# EAGLE board demeter_v22 (EAGLE 6.2)
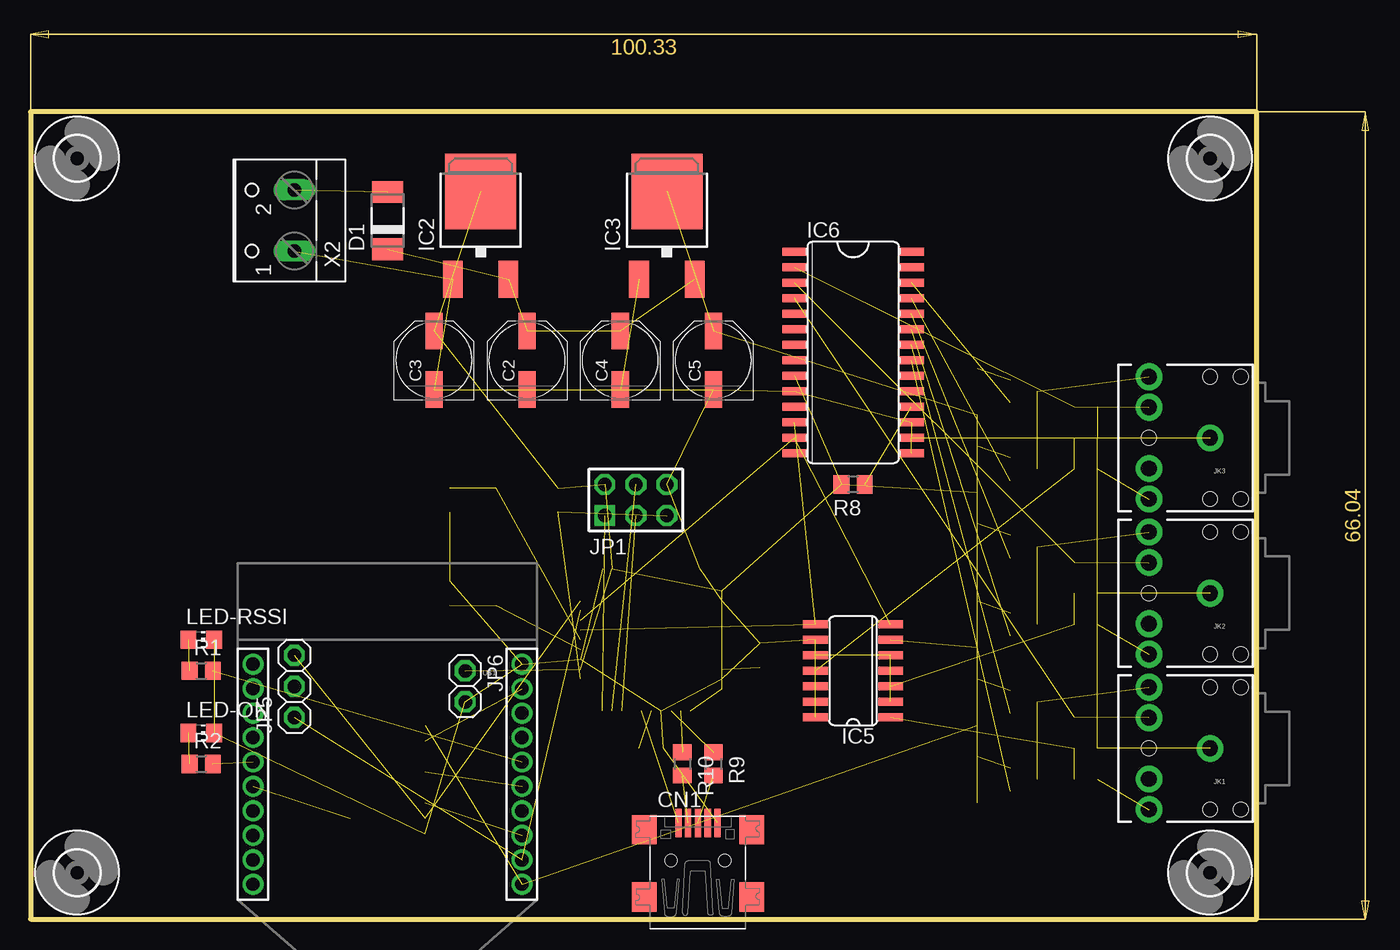
[diagram p0: board, top side]
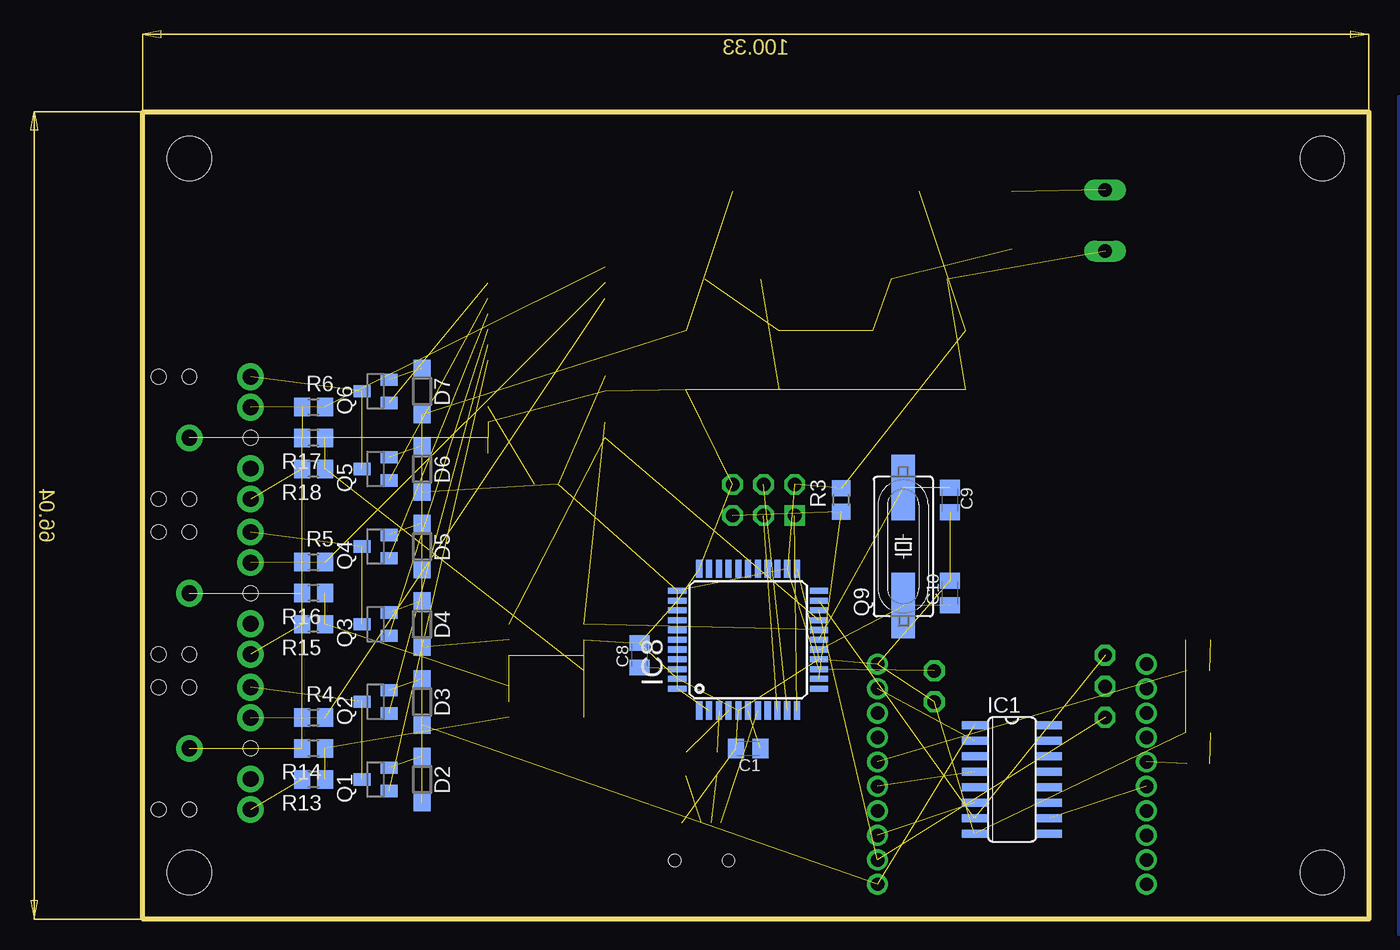
[diagram p1: board, bottom side, seen from below]

Size 100.33 x 66.04 mm. Coordinates in mm from the lower left corner, seen from the top.
Outline: 0,0 100.33,0 100.33,66.04 0,66.04 0,0
Copper layers (1*16): Top 0.035mm / dielectric 1.5mm / Bottom 0.035mm
Design rules: minimum track width 12mil, minimum drill 1.1mm, track to track 8mil, track to pad 8mil, pad to pad 8mil, via to via 8mil, smd to smd 8mil, copper to edge 10mil, drill to drill 8mil, minimum pad ring 12mil, minimum via ring 10mil, stop-mask expansion 4mil, vias tented up to drill 25mil, thermal gap 10mil

## Footprints (pad centres in the part's own frame; a part is rotated, then mirrored left to right if it is on the bottom)
C0805K = smd 1.3 x 1.6: 1 -1,0; 2 1,0
PANASONIC_D = smd 3 x 1.4: + 2.4,0; - -2.4,0
USB-MINIB = smd 0.5 x 2.308: D+ 0,4.064; D- -0.8,4.064; GND 1.6,4.064; ID 0.8,4.064; VBUS -1.6,4.064 | smd 2 x 2.4: GND1 -4.4,-2; GND2 -4.4,3.5; GND3 4.4,3.5; GND4 4.4,-2 | hole 1: -2.2,1; 2.2,1
DO-214AC = smd 1.778 x 2.54: A 2.342,0; C -2.342,0
SOD123 = smd 1.4 x 1.4: A 1.9,0; C -1.9,0
SO16 = smd 0.66 x 2.032: 1 -4.445,-3.073; 2 -3.175,-3.073; 3 -1.905,-3.073; 4 -0.635,-3.073; 5 0.635,-3.073; 6 1.905,-3.073; 7 3.175,-3.073; 8 4.445,-3.073; 9 4.445,3.073; 10 3.175,3.073; 11 1.905,3.073; 12 0.635,3.073; 13 -0.635,3.073; 14 -1.905,3.073; 15 -3.175,3.073; 16 -4.445,3.073
DPACK = smd 1.6 x 3: 1 -2.28,-4.8; 3 2.28,-4.8 | smd 5.8 x 6.2: 4 0,2.38
SO14 = smd 2.032 x 0.66: 1 -3.073,3.81; 2 -3.073,2.54; 3 -3.073,1.27; 4 -3.073,0; 5 -3.073,-1.27; 6 -3.073,-2.54; 7 -3.073,-3.81; 8 3.073,-3.81; 9 3.073,-2.54; 10 3.073,-1.27; 11 3.073,0; 12 3.073,1.27; 13 3.073,2.54; 14 3.073,3.81
SO28W = smd 0.66 x 2.032: 1 -7.62,-4.78; 2 -6.35,-4.78; 3 -5.08,-4.78; 4 -3.81,-4.78; 5 -2.54,-4.78; 6 -1.27,-4.78; 7 0,-4.78; 8 1.27,-4.78; 9 2.54,-4.78; 10 3.81,-4.78; 11 5.08,-4.78; 12 6.35,-4.78; 13 7.62,-4.78; 14 8.89,-4.78; 15 8.89,4.78; 16 7.62,4.78; 17 6.35,4.78; 18 5.08,4.78; 19 3.81,4.78; 20 2.54,4.78; 21 1.27,4.78; 22 0,4.78; 23 -1.27,4.78; 24 -2.54,4.78; 25 -3.81,4.78; 26 -5.08,4.78; 27 -6.35,4.78; 28 -7.62,4.78
TQFP44 = smd 1.5 x 0.5: 1 -5.8,4; 2 -5.8,3.2; 3 -5.8,2.4; 4 -5.8,1.6; 5 -5.8,0.8; 6 -5.8,0; 7 -5.8,-0.8; 8 -5.8,-1.6; 9 -5.8,-2.4; 10 -5.8,-3.2; 11 -5.8,-4; 23 5.8,-4; 24 5.8,-3.2; 25 5.8,-2.4; 26 5.8,-1.6; 27 5.8,-0.8; 28 5.8,0; 29 5.8,0.8; 30 5.8,1.6; 31 5.8,2.4; 32 5.8,3.2; 33 5.8,4 | smd 0.5 x 1.5: 12 -4,-5.8; 13 -3.2,-5.8; 14 -2.4,-5.8; 15 -1.6,-5.8; 16 -0.8,-5.8; 17 0,-5.8; 18 0.8,-5.8; 19 1.6,-5.8; 20 2.4,-5.8; 21 3.2,-5.8; 22 4,-5.8; 34 4,5.8; 35 3.2,5.8; 36 2.4,5.8; 37 1.6,5.8; 38 0.8,5.8; 39 0,5.8; 40 -0.8,5.8; 41 -1.6,5.8; 42 -2.4,5.8; 43 -3.2,5.8; 44 -4,5.8
AUDIO-JACK = drill 1.3 pad 2.184: RING 5,5; RSH 5,2.5; SLEEVE 0,0; TIP 5,-5; TSH 5,-2.5 | hole 1.2: 0,5; -2.5,5; -2.5,-5; 0,-5; 5,0
AVR-ISP-6 = drill 1.1 square: 1 -2.54,-1.27 | drill 1.1 octagon: 2 -2.54,1.27; 3 0,-1.27; 4 0,1.27; 5 2.54,-1.27; 6 2.54,1.27
1X03 = drill 1.1 octagon: 1 -2.54,0; 2 0,0; 3 2.54,0
1X02 = drill 1.1 octagon: 1 -1.27,0; 2 1.27,0
CHIP-LED0805 = smd 1.5 x 1.3: A 0,-1.05; C 0,1.05
SOT23 = smd 1 x 1.4: 1 -0.95,-1.1; 2 0.95,-1.1; 3 0,1.1
HC49UP = smd 5.334 x 1.93: 1 -4.826,0; 2 4.826,0
R0805 = smd 1.3 x 1.5: 1 -0.95,0; 2 0.95,0
XBEE-1 = drill 1.1: 1 -11,20; 2 -11,18; 3 -11,16; 4 -11,14; 5 -11,12; 6 -11,10; 7 -11,8; 8 -11,6; 9 -11,4; 10 -11,2; 11 11,2; 12 11,4; 13 11,6; 14 11,8; 15 11,10; 16 11,12; 17 11,14; 18 11,16; 19 11,18; 20 11,20
3,6 = hole 3.6: 0,0
W237-102 = drill 1.1 long: 1 -2.5,-1.27; 2 2.5,-1.27

## Placement (x,y rotation side)
C1  1uF  [C0805K]  50.8,13.97 180 bottom
C2  22uF  [PANASONIC_D]  40.64,45.72 90 top
C3  100uF  [PANASONIC_D]  33.02,45.72 90 top
C4  22uF  [PANASONIC_D]  48.26,45.72 90 top
C5  100uF  [PANASONIC_D]  55.88,45.72 90 top
C8  100nF  [C0805K]  59.69,21.59 90 bottom
C9  22pF  [C0805K]  34.29,34.29 270 bottom
C10  22pF  [C0805K]  34.29,26.67 90 bottom
CN1  [USB-MINIB]  54.61,3.81 0 top
D1  S1M  [DO-214AC]  29.21,57.15 90 top
D2  [SOD123]  77.47,11.43 270 bottom
D3  [SOD123]  77.47,17.78 270 bottom
D4  [SOD123]  77.47,24.13 270 bottom
D5  [SOD123]  77.47,30.48 270 bottom
D6  [SOD123]  77.47,36.83 270 bottom
D7  [SOD123]  77.47,43.18 270 bottom
IC1  4050  [SO16]  29.21,11.43 270 bottom
IC2  LM1117-5.0  [DPACK]  36.83,57.15 0 top
IC3  LM1117-3.3  [DPACK]  52.07,57.15 0 top
IC5  MCP3424  [SO14]  67.31,20.32 180 top
IC6  MCP23017SO  [SO28W]  67.31,46.99 270 top
IC8  ATMEGA32U4-AU  [TQFP44]  50.8,22.86 90 bottom
JK1  [AUDIO-JACK]  96.52,13.97 180 top
JK2  [AUDIO-JACK]  96.52,26.67 180 top
JK3  [AUDIO-JACK]  96.52,39.37 180 top
JP1  AVR-ISP-6  [AVR-ISP-6]  49.53,34.29 0 top
JP5  [1X03]  21.59,19.05 90 top
JP6  [1X02]  35.56,19.05 270 top
LED-ON  [CHIP-LED0805]  13.97,15.24 270 top
LED-RSSI  [CHIP-LED0805]  13.97,22.86 270 top
Q1  IRLML6402  [SOT23]  81.28,11.43 90 bottom
Q2  [SOT23]  81.28,17.78 90 bottom
Q3  IRLML6402  [SOT23]  81.28,24.13 90 bottom
Q4  [SOT23]  81.28,30.48 90 bottom
Q5  IRLML6402  [SOT23]  81.28,36.83 90 bottom
Q6  [SOT23]  81.28,43.18 90 bottom
Q9  [HC49UP]  38.1,30.48 90 bottom
R1  [R0805]  13.97,20.32 0 top
R2  [R0805]  13.97,12.7 0 top
R3  [R0805]  43.18,34.29 90 bottom
R4  [R0805]  86.36,16.51 0 bottom
R5  [R0805]  86.36,29.21 0 bottom
R6  [R0805]  86.36,41.91 0 bottom
R8  [R0805]  67.31,35.56 180 top
R9  22  [R0805]  55.88,12.7 270 top
R10  22  [R0805]  53.34,12.7 270 top
R13  [R0805]  86.36,11.43 180 bottom
R14  [R0805]  86.36,13.97 180 bottom
R15  [R0805]  86.36,24.13 180 bottom
R16  [R0805]  86.36,26.67 180 bottom
R17  [R0805]  86.36,39.37 180 bottom
R18  [R0805]  86.36,36.83 180 bottom
U$1  XBEE-1B1  [XBEE-1]  29.21,22.86 180 top
U$2  [3,6]  96.52,62.23 0 top
U$3  [3,6]  96.52,3.81 0 top
U$4  [3,6]  3.81,3.81 0 top
U$5  [3,6]  3.81,62.23 0 top
X2  [W237-102]  20.32,57.15 90 top

## Library data of the parts
C1-C5 C8-C10 CN1 D1-D7 IC1-IC3 IC8 JK1-JK3 JP1 JP5 JP6 LED-ON LED-RSSI Q1-Q6 Q9 R1-R6 R8-R10 R13-R18 U$1-U$5 X2 = mark_2
IC5 = mark_2; MPN: MCP3424-E/SL; OC_FARNELL: 1630424; OC_NEWARK: 54M4871; PACKAGE: SOIC-14; SUPPLIER: Microchip
IC6 = mark_2; MF: MICROCHIP; MPN: MCP23017-E/SO; OC_FARNELL: 1332087; OC_NEWARK: 31K2958

## Nets
+3V3: C5.+ D3.A D5.A D7.A IC1.1 IC3.4 U$1.1
+5V: C3.+ D2.A D4.A D6.A IC2.4 IC5.6 IC6.9 IC8.2 IC8.14 IC8.24 IC8.34 IC8.44 JP1.2 JP6.1 R3.2 R8.2
+12V: C2.+ C4.+ D1.C IC2.3 IC3.3
CH1: IC5.1 R13.1 R14.1
CH2: IC5.3 R15.1 R16.1
CH3: IC5.11 R17.1 R18.1
CH4: IC5.13
CTS: U$1.12
D+: IC8.4 R9.1
D-: IC8.3 R10.1
DTR: IC1.3
EN: JP5.2
EN1-3: IC6.22 Q2.1
EN1-5: IC6.21 Q1.1
EN2-3: IC6.24 Q4.1
EN2-5: IC6.23 Q3.1
EN3-3: IC6.26 Q6.1
EN3-5: IC6.25 Q5.1
GND: C1.2 C2.- C3.- C4.- C5.- C8.2 C9.2 C10.2 CN1.GND IC1.8 IC2.1 IC3.1 IC5.2 IC5.4 IC5.5 IC5.9 IC5.10 IC5.12 IC5.14 IC6.10 IC6.15 IC6.16 IC6.17 IC8.5 IC8.15 IC8.23 IC8.33 IC8.35 IC8.43 JK1.SLEEVE JK2.SLEEVE JK3.SLEEVE JP1.6 JP6.2 LED-ON.C LED-RSSI.C R4.1 R5.1 R6.1 R14.2 R16.2 R17.2 U$1.10 X2.1
MISO: IC8.11 JP1.1
MOSI: IC8.10 JP1.4
N$1: D1.A X2.2
N$3: IC1.6 U$1.3
N$4: IC1.4 U$1.5
N$6: LED-RSSI.A R1.1
N$7: IC1.2 U$1.9
N$8: IC1.10 U$1.16
N$9: LED-ON.A R2.1
N$10: R2.2 U$1.15
N$11: IC6.18 R8.1
N$12: JK1.TIP Q1.3 Q2.3
N$13: D2.C Q1.2
N$14: D3.C Q2.2
N$15: JK2.TIP Q3.3 Q4.3
N$16: D4.C Q3.2
N$17: D5.C Q4.2
N$18: JK3.TIP Q5.3 Q6.3
N$19: D6.C Q5.2
N$20: D7.C Q6.2
N$24: C1.1 IC8.6
N$25: C8.1 IC8.42
N$26: C9.1 IC8.17 Q9.2
N$27: C10.1 IC8.16 Q9.1
N$28: CN1.D+ R9.2
N$29: CN1.D- R10.2
N$30: JK1.RING R13.2
N$32: JK2.RING R15.2
N$34: JK3.RING R18.2
RESET: IC1.5
RSSI: R1.2 U$1.6
RST: IC8.13 JP1.5 R3.1
RTS: IC1.9
RX: IC8.20 JP5.1 U$1.2
SCK: IC8.9 JP1.3
SCL: IC5.8 IC6.12 IC8.18
SDA: IC5.7 IC6.13 IC8.19
SN1: IC6.4 JK1.TSH R4.2
SN2: IC6.3 JK2.TSH R5.2
SN3: IC6.2 JK3.TSH R6.2
TX: IC1.7 IC8.21 JP5.3
VBUS: CN1.VBUS IC8.7

## Tracks (layer width: path | path; a pad name or v marks a point on that pad's centre or on a via)
+3V3  (6 unrouted)
+5V  (15 unrouted)
+12V  (4 unrouted)
CH1  (2 unrouted)
CH2  (2 unrouted)
CH3  (2 unrouted)
D+  (1 unrouted)
D-  (1 unrouted)
EN1-3  (1 unrouted)
EN1-5  (1 unrouted)
EN2-3  (1 unrouted)
EN2-5  (1 unrouted)
EN3-3  (1 unrouted)
EN3-5  (1 unrouted)
GND  (43 unrouted)
  pour Bottom (isolate 0.813): -2.54,67.31 -5.08,67.31 -5.08,-1.27 -2.54,-1.27
MISO  (1 unrouted)
MOSI  (1 unrouted)
N$1  (1 unrouted)
N$3  (1 unrouted)
N$4  (1 unrouted)
N$6  (1 unrouted)
N$7  (1 unrouted)
N$8  (1 unrouted)
N$9  (1 unrouted)
N$10  (1 unrouted)
N$11  (1 unrouted)
N$12  (2 unrouted)
N$13  (1 unrouted)
N$14  (1 unrouted)
N$15  (2 unrouted)
N$16  (1 unrouted)
N$17  (1 unrouted)
N$18  (2 unrouted)
N$19  (1 unrouted)
N$20  (1 unrouted)
N$24  (1 unrouted)
N$25  (1 unrouted)
N$26  (2 unrouted)
N$27  (2 unrouted)
N$28  (1 unrouted)
N$29  (1 unrouted)
N$30  (1 unrouted)
N$32  (1 unrouted)
N$34  (1 unrouted)
RSSI  (1 unrouted)
RST  (2 unrouted)
RX  (2 unrouted)
SCK  (1 unrouted)
SCL  (2 unrouted)
SDA  (2 unrouted)
SN1  (2 unrouted)
SN2  (2 unrouted)
SN3  (2 unrouted)
TX  (2 unrouted)
VBUS  (1 unrouted)